# Altium PCB Socket_Burners.pcbdoc
Units mil, origin at the board's own origin, x right, y up, seen from the top; angles counter-clockwise.
Board outline 5387.64 x 2619.88 mil, 2 copper layers (Top Layer, Bottom Layer); 60 components, 36 nets, 178 pads, 5 vias.
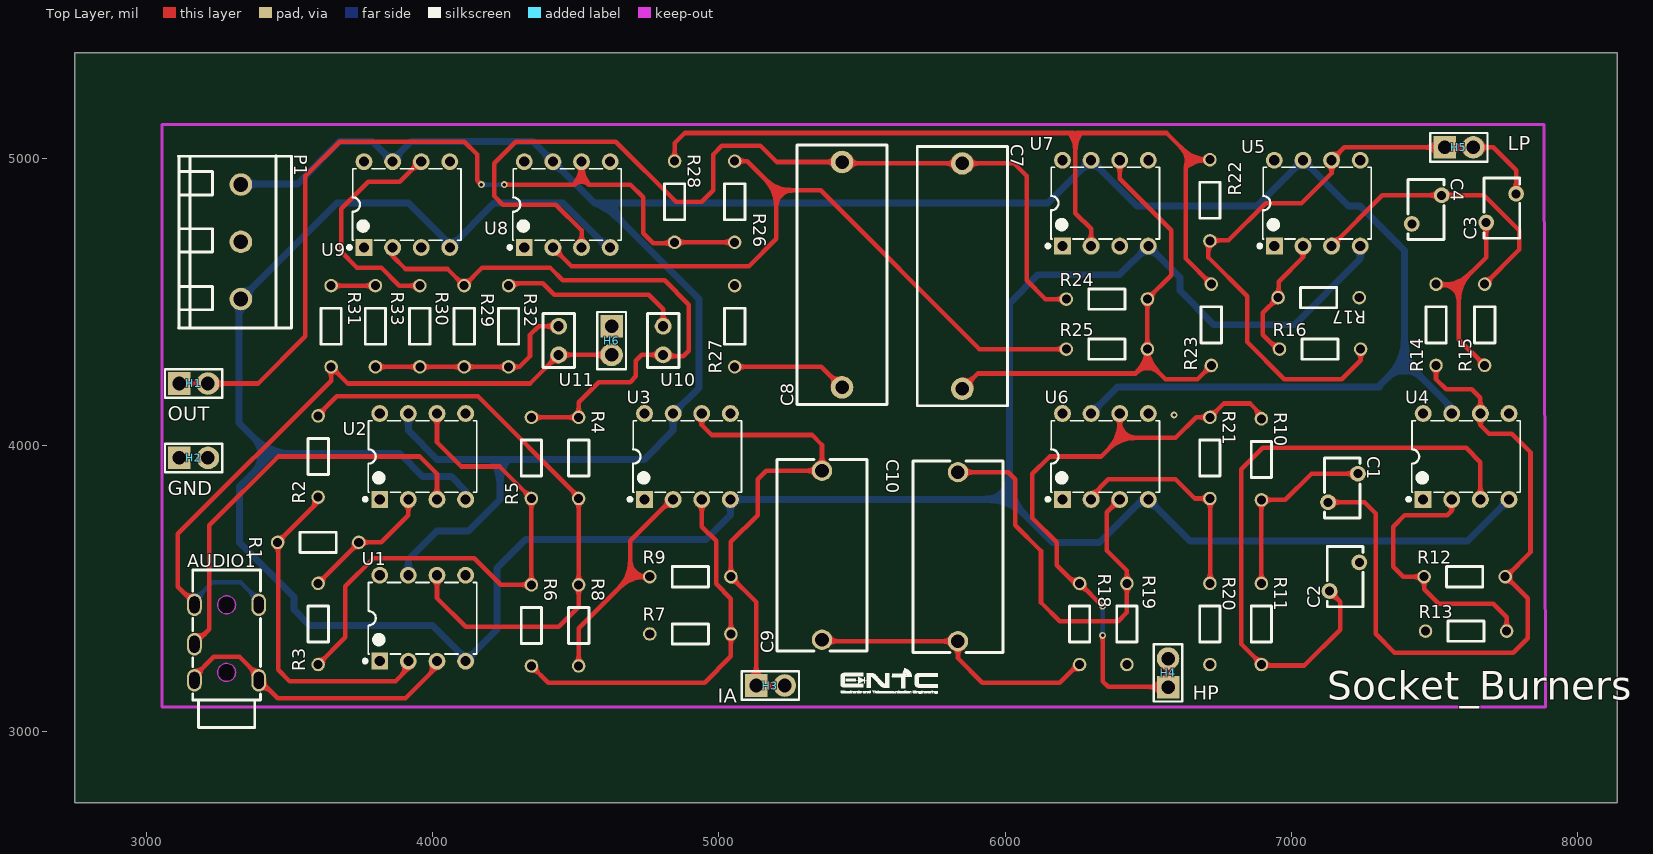
[diagram p0: Top Layer view]
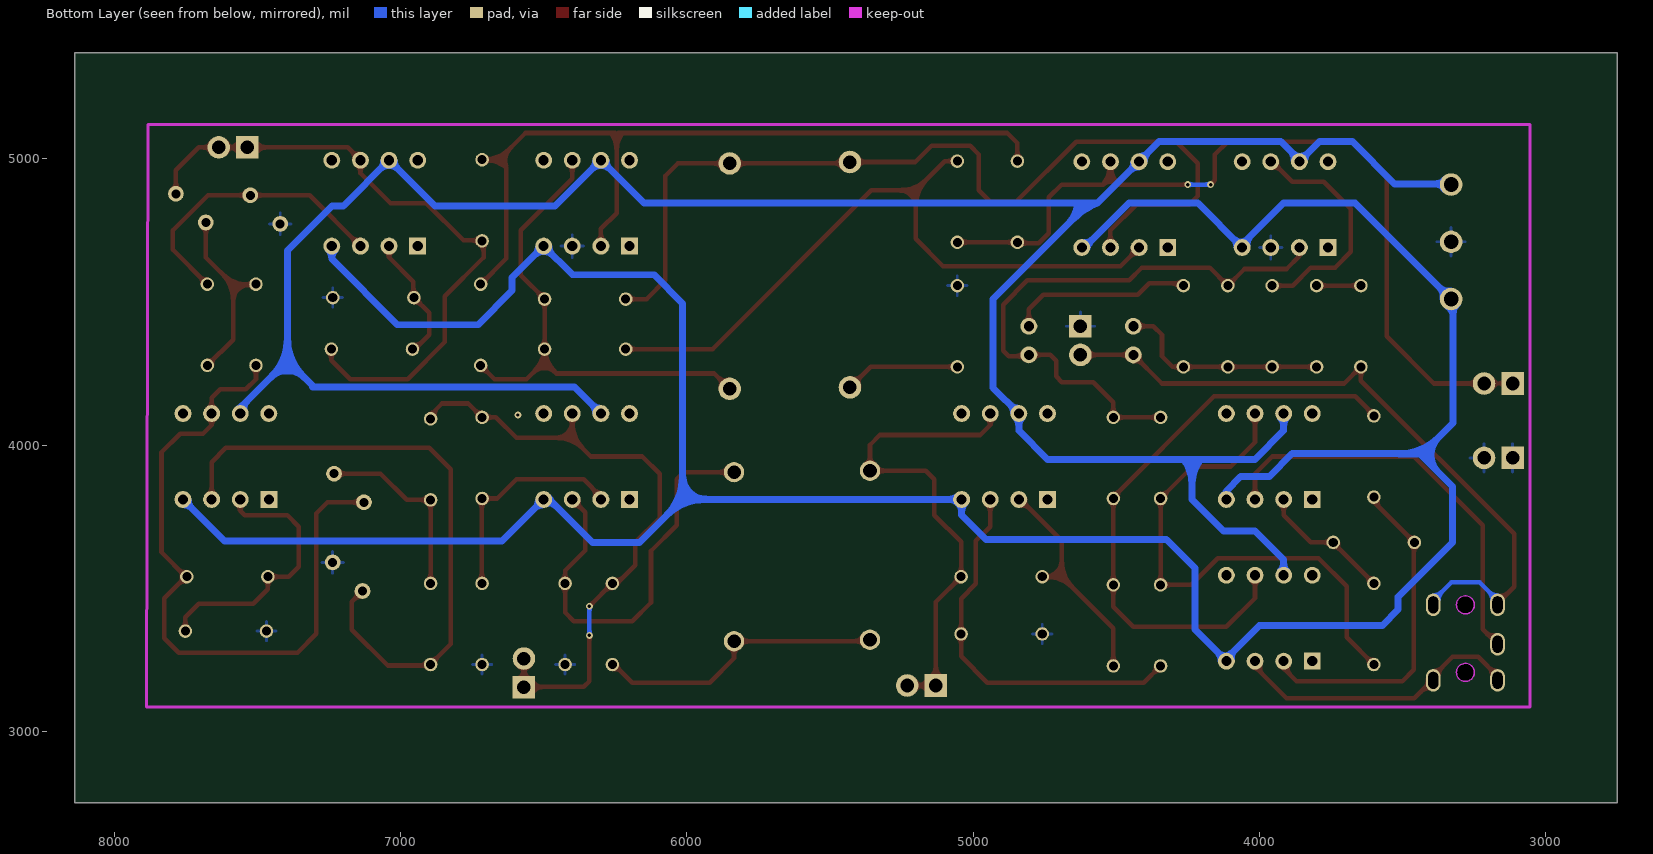
[diagram p1: Bottom Layer view, seen from below]

## Layer stack, top to bottom
Top Layer: signal copper (thickness not stored)
Dielectric: dielectric 12.6, FR-4, Dk 4.8
Bottom Layer: signal copper (thickness not stored)

## Board outline
8137.64,2750 2750,2750 2750,5369.88 8137.64,5369.88

## Design rules (kind name [scope] priority, off if disabled: settings)
BoardOutlineClearance copperThickness1oz [All] p0: genericclearance=10 ignorepadtopadclearanceinfootprint=FALSE except(0: Arc-SplitContinuation Track-SplitContinuation SMDPad-SplitContinuation THPad-SplitContinuation Via-SplitContinuation Fill-SplitContinuation Poly-SplitContinuation Region-SplitContinuation Text-SplitContinuation; 6: Track-CutoutEdge SMDPad-CutoutEdge THPad-CutoutEdge Via-CutoutEdge Region-CutoutEdge; 11.8: Track-OutlineEdge SMDPad-OutlineEdge THPad-OutlineEdge Via-OutlineEdge Fill-OutlineEdge Region-OutlineEdge Poly-OutlineEdge Text-OutlineEdge Fill-CutoutEdge)
BoardOutlineClearance copperThickness2oz [All] p0: genericclearance=10 ignorepadtopadclearanceinfootprint=FALSE except(0: Arc-SplitContinuation Track-SplitContinuation SMDPad-SplitContinuation THPad-SplitContinuation Via-SplitContinuation Fill-SplitContinuation Poly-SplitContinuation Region-SplitContinuation Text-SplitContinuation; 6: Track-CutoutEdge SMDPad-CutoutEdge THPad-CutoutEdge Via-CutoutEdge Region-CutoutEdge; 11.8: Track-OutlineEdge SMDPad-OutlineEdge THPad-OutlineEdge Via-OutlineEdge Fill-OutlineEdge Region-OutlineEdge Poly-OutlineEdge Text-OutlineEdge Fill-CutoutEdge)
Clearance copperThickness1oz [(InNet('$1N2122') OR InNet('GND') OR InNet('LP') OR InNet('$1N3406') OR InNet('$1N3413') OR InNet('$1N3493') OR InNet('-6V') OR InNet('+6V') OR InNet('$1N1412') OR InNet('$1N1406') OR InNet('$1N1439') OR InNet('$1N1445') OR InNet('RL') OR InNet('$1N1575') OR InNet('$1N1792') OR InNet('IA') OR InNet('HP') OR InNet('$1N2127') OR InNet('$1N2610') OR InNet('$1N2938') OR InNet('$1N3220') OR InNet('$1N3417') OR InNet('V_OUT') OR InNet('$1N3727') OR InNet('$1N4390') OR InNet('$1N4395') OR InNet('LA') OR InNet('RA') OR InNet('RLD') OR InNet('$1N5195') OR InNet('$1N5171') OR InNet('$1N5247') OR InNet('$1N6619') OR InNet('$1N6626') OR InNet('$1N7922') OR InNet('$1N7929'))] p1: gap=7 ignorepadtopadclearanceinfootprint=FALSE except(4: Track-Track; 6: Track-SMDPad SMDPad-SMDPad Track-THPad SMDPad-THPad THPad-THPad Track-Via SMDPad-Via THPad-Via Via-Via SMDPad-Fill THPad-Fill Via-Fill Fill-Fill Track-Region SMDPad-Region THPad-Region Via-Region Region-Region Track-Poly SMDPad-Poly THPad-Poly Via-Poly Fill-Poly Region-Poly Poly-Poly Track-Text SMDPad-Text THPad-Text Via-Text Fill-Text Region-Text Poly-Text Text-Text; 6.9: Track-Hole SMDPad-Hole THPad-Hole Via-Hole Fill-Hole Region-Hole Poly-Hole Text-Hole Sheet-Hole; 11.8: Track-Fill Fill-Region Track-Sheet SMDPad-Sheet THPad-Sheet Via-Sheet Fill-Sheet Region-Sheet Poly-Sheet Text-Sheet)
Clearance copperThickness2oz [All] p1: gap=7 ignorepadtopadclearanceinfootprint=FALSE except(6: Track-SMDPad SMDPad-SMDPad Track-THPad SMDPad-THPad THPad-THPad Track-Via SMDPad-Via THPad-Via Via-Via SMDPad-Fill THPad-Fill Via-Fill Fill-Fill Track-Region SMDPad-Region THPad-Region Via-Region Region-Region Track-Poly SMDPad-Poly THPad-Poly Via-Poly Fill-Poly Region-Poly Poly-Poly Track-Text SMDPad-Text THPad-Text Via-Text Fill-Text Region-Text Poly-Text Text-Text; 6.9: Track-Hole SMDPad-Hole THPad-Hole Via-Hole Fill-Hole Region-Hole Poly-Hole Text-Hole Sheet-Hole; 8: Track-Track; 11.8: Track-Fill Fill-Region Track-Sheet SMDPad-Sheet THPad-Sheet Via-Sheet Fill-Sheet Region-Sheet Poly-Sheet Text-Sheet)
DiffPairsRouting differentialPair [All] p1: maxuncoupledlength=10 minlimit=6 maxlimit=6 mostfreqgap=6 toplayer_minwidth=5 toplayer_prefwidth=10 toplayer_maxwidth=100 bottomlayer_minwidth=5 bottomlayer_prefwidth=10 bottomlayer_maxwidth=100
PasteMaskExpansion pasteMaskExpansion [All] p1: expansion=0
PlaneConnect innerPlane [All] p1: planeconnectstyle=Relief reliefexpansion=20 reliefentries=4 reliefconductorwidth=10 reliefairgap=10
PolygonConnect copperRegion [All] p1: connectstyle=Relief reliefentries=4 reliefconductorwidth=10 polygonreliefangle="90 Angle" airgapwidth=10
RoutingVias viaSize [All] p1: viastyle="Through Hole" holewidth=12.0078 minholewidth=11.811 maxholewidth=248.0314 width=24.0158 minwidth=19.685 maxwidth=393.7008
SolderMaskExpansion solderMaskExpansion [All] p1: useseparateexpansions=TRUE expansion=2 expansionbottom=2
Width copperThickness1oz [All] p1: maxlimit=100 minlimit=5 preferedwidth=10
Width copperThickness2oz [All] p1: maxlimit=100 minlimit=8 preferedwidth=10

## Components (designator, comment, footprint, x,y, rotation, side; value= is the part's Value field where it differs from the comment)
AUDIO1 "PJ-3135-B" AUDIO-TH_PJ-3135-B 3280,3309.88 r0 top
C1 "CC1H104ZA1ED3F5O1100" CAP-TH_L5.3-W3.2-P2.54-D0.6-S2.65 7180,3849.88 r270 top
C2 "CC1H104ZA1ED3F5O1100" CAP-TH_L5.3-W3.2-P2.54-D0.6-S2.65 7185,3539.88 r90 top
C3 "CC1H104ZA1ED3F5O1100" CAP-TH_L5.3-W3.2-P2.54-D0.6-S2.65 7732.5,4827.38 r90 top
C4 "CC1H104ZA1ED3F5O1100" CAP-TH_L5.3-W3.2-P2.54-D0.6-S2.65 7472.5,4822.38 r270 top
C7 "MPP684K2E2408158LC" CAP-TH_L23.0-W8.0-P20.00-D1.2 5850,4589.88 r270 top
C8 "MPP684K2E2408158LC" CAP-TH_L23.0-W8.0-P20.00-D1.2 5430,4594.88 r90 top
C9 "KP105J2G1501" CAP-TH_L17.0-W8.0-P15.00-D1.2 5360,3614.88 r90 top
C10 "KP105J2G1501" CAP-TH_L17.0-W8.0-P15.00-D1.2 5835,3609.88 r270 top
H1 "PZ254V-11-02P" HDR-TH_2P-P2.54-V-M 3165,4214.88 r0 top
H2 "PZ254V-11-02P" HDR-TH_2P-P2.54-V-M 3165,3954.88 r0 top
H3 "PZ254V-11-02P" HDR-TH_2P-P2.54-V-M 5180,3159.88 r0 top
H4 "PZ254V-11-02P" HDR-TH_2P-P2.54-V-M 6568.9,3204.05 r90 top
H5 "PZ254V-11-02P" HDR-TH_2P-P2.54-V-M 7585,5039.88 r0 top
H6 "PZ254V-11-02P" HDR-TH_2P-P2.54-V-M 4625,4364.88 r270 top
P1 "WJ500V-5.08-3P" CONN-TH_3P-P5.00_WJ500V-5.08-3P 3330,4709.88 r270 top
R1 "Res_AXIAL-1/8W" RES-TH_BD1.8-L3.2-P7.20-D0.4 3600,3659.88 r180 top
R2 "Res_AXIAL-1/8W" RES-TH_BD1.8-L3.2-P7.20-D0.4 3600,3959.88 r90 top
R3 "Res_AXIAL-1/8W" RES-TH_BD1.8-L3.2-P7.20-D0.4 3600,3374.88 r90 top
R4 "Res_AXIAL-1/8W" RES-TH_BD1.8-L3.2-P7.20-D0.4 4510,3954.88 r270 top
R5 "Res_AXIAL-1/8W" RES-TH_BD1.8-L3.2-P7.20-D0.4 4345,3954.88 r90 top
R6 "Res_AXIAL-1/8W" RES-TH_BD1.8-L3.2-P7.20-D0.4 4345,3369.88 r270 top
R7 "Res_AXIAL-1/8W" RES-TH_BD1.8-L3.2-P7.20-D0.4 4900,3339.88 r0 top
R8 "Res_AXIAL-1/8W" RES-TH_BD1.8-L3.2-P7.20-D0.4 4510,3369.88 r270 top
R9 "Res_AXIAL-1/8W" RES-TH_BD1.8-L3.2-P7.20-D0.4 4900,3539.88 r0 top
R10 "Res_AXIAL-1/8W" RES-TH_BD1.8-L3.2-P7.20-D0.4 6895,3949.88 r270 top
R11 "Res_AXIAL-1/8W" RES-TH_BD1.8-L3.2-P7.20-D0.4 6895,3374.88 r270 top
R12 "Res_AXIAL-1/8W" RES-TH_BD1.8-L3.2-P7.20-D0.4 7605,3539.88 r0 top
R13 "Res_AXIAL-1/8W" RES-TH_BD1.8-L3.2-P7.20-D0.4 7610,3349.88 r0 top
R14 "Res_AXIAL-1/8W" RES-TH_BD1.8-L3.2-P7.20-D0.4 7505,4419.88 r90 top
R15 "Res_AXIAL-1/8W" RES-TH_BD1.8-L3.2-P7.20-D0.4 7675,4419.88 r90 top
R16 "Res_AXIAL-1/8W" RES-TH_BD1.8-L3.2-P7.20-D0.4 7100,4334.88 r0 top
R17 "Res_AXIAL-1/8W" RES-TH_BD1.8-L3.2-P7.20-D0.4 7095,4514.88 r180 top
R18 "Res_AXIAL-1/8W" RES-TH_BD1.8-L3.2-P7.20-D0.4 6260,3374.88 r270 top
R19 "Res_AXIAL-1/8W" RES-TH_BD1.8-L3.2-P7.20-D0.4 6425,3374.88 r90 top
R20 "Res_AXIAL-1/8W" RES-TH_BD1.8-L3.2-P7.20-D0.4 6715,3374.88 r270 top
R21 "Res_AXIAL-1/8W" RES-TH_BD1.8-L3.2-P7.20-D0.4 6715,3954.88 r270 top
R22 "Res_AXIAL-1/8W" RES-TH_BD1.8-L3.2-P7.20-D0.4 6715,4854.88 r90 top
R23 "Res_AXIAL-1/8W" RES-TH_BD1.8-L3.2-P7.20-D0.4 6720,4419.88 r270 top
R24 "Res_AXIAL-1/8W" RES-TH_BD1.8-L3.2-P7.20-D0.4 6355,4509.88 r0 top
R25 "Res_AXIAL-1/8W" RES-TH_BD1.8-L3.2-P7.20-D0.4 6355,4334.88 r0 top
R26 "Res_AXIAL-1/8W" RES-TH_BD1.8-L3.2-P7.20-D0.4 5055,4849.88 r90 top
R27 "Res_AXIAL-1/8W" RES-TH_BD1.8-L3.2-P7.20-D0.4 5055,4414.88 r90 top
R28 "Res_AXIAL-1/8W" RES-TH_BD1.8-L3.2-P7.20-D0.4 4845,4849.88 r270 top
R29 "Res_AXIAL-1/8W" RES-TH_BD1.8-L3.2-P7.20-D0.4 4110,4414.88 r270 top
R30 "Res_AXIAL-1/8W" RES-TH_BD1.8-L3.2-P7.20-D0.4 3955,4414.88 r270 top
R31 "Res_AXIAL-1/8W" RES-TH_BD1.8-L3.2-P7.20-D0.4 3645,4414.88 r270 top
R32 "Res_AXIAL-1/8W" RES-TH_BD1.8-L3.2-P7.20-D0.4 4265,4414.88 r270 top
R33 "Res_AXIAL-1/8W" RES-TH_BD1.8-L3.2-P7.20-D0.4 3800,4414.88 r90 top
U1 "OP07CP" DIP-8_L9.6-W6.4-P2.54-LS7.6-BL-1 3965,3394.88 r0 top
U2 "OP07CP" DIP-8_L9.6-W6.4-P2.54-LS7.6-BL-1 3965,3959.88 r0 top
U3 "OP07CP" DIP-8_L9.6-W6.4-P2.54-LS7.6-BL-1 4890,3959.88 r0 top
U4 "OP07CP" DIP-8_L9.6-W6.4-P2.54-LS7.6-BL-1 7610,3959.88 r0 top
U5 "OP07CP" DIP-8_L9.6-W6.4-P2.54-LS7.6-BL-1 7090,4844.88 r0 top
U6 "OP07CP" DIP-8_L9.6-W6.4-P2.54-LS7.6-BL-1 6350,3959.88 r0 top
U7 "OP07CP" DIP-8_L9.6-W6.4-P2.54-LS7.6-BL-1 6350,4844.88 r0 top
U8 "OP07CP" DIP-8_L9.6-W6.4-P2.54-LS7.6-BL-1 4470,4839.88 r0 top
U9 "OP07CP" DIP-8_L9.6-W6.4-P2.54-LS7.6-BL-1 3910,4839.88 r0 top
U10 "CC1H102MA1EDB44B1100" CAP-TH_L4.8-W2.8-P2.54-D0.7 4805,4364.88 r90 top
U11 "CC1H102MA1EDB44B1100" CAP-TH_L4.8-W2.8-P2.54-D0.7 4440,4364.88 r270 top

## Footprints (in the part's own frame and the unit in brackets; to place one, negate y for a bottom-side part, rotate by r counter-clockwise, add the part's x,y. Pads: shape width x height; smd on the part's side, far side on the other; paste and mask are expansions set on the pad)
AUDIO-TH_PJ-3135-B [mm]
  oval 1.3x2 hole 0.9 slot 1.5 at 90 deg: 1(-2.85,-3.35) 1(2.85,-3.35) 2(-2.85,-0.15) 3(-2.85,3.35) 3(2.85,3.35)
  Board Outline Layer circle w0.005: c0,3.35 r0.8
  Board Outline Layer circle w0.005: c0,-2.65 r0.8
  Board Outline Layer region: 0.8,3.35 0.721,3.003 0.499,2.725 0.178,2.57 -0.178,2.57 -0.499,2.725 -0.721,3.003 -0.8,3.35 -0.8,3.35 -0.721,3.697 -0.499,3.975 -0.178,4.13 0.178,4.13 0.499,3.975 0.721,3.697 0.8,3.35
  Board Outline Layer region: 0.8,-2.65 0.721,-2.997 0.499,-3.275 0.178,-3.43 -0.178,-3.43 -0.499,-3.275 -0.721,-2.997 -0.8,-2.65 -0.8,-2.65 -0.721,-2.303 -0.499,-2.025 -0.178,-1.87 0.178,-1.87 0.499,-2.025 0.721,-2.303 0.8,-2.65
  Multi-Layer board cut-out: 0.8,3.35 0.721,3.003 0.499,2.725 0.178,2.57 -0.178,2.57 -0.499,2.725 -0.721,3.003 -0.8,3.35 -0.8,3.35 -0.721,3.697 -0.499,3.975 -0.178,4.13 0.178,4.13 0.499,3.975 0.721,3.697 0.8,3.35
  Multi-Layer board cut-out: 0.8,-2.65 0.721,-2.997 0.499,-3.275 0.178,-3.43 -0.178,-3.43 -0.499,-3.275 -0.721,-2.997 -0.8,-2.65 -0.8,-2.65 -0.721,-2.303 -0.499,-2.025 -0.178,-1.87 0.178,-1.87 0.499,-2.025 0.721,-2.303 0.8,-2.65
  silkscreen extent -3,-7.55 3,6.45
CAP-TH_L4.8-W2.8-P2.54-D0.7 [mm]
  round 1.5 hole 0.9: 1(-1.27,0) 2(1.27,0)
  silkscreen extent -2.4,-1.4 2.4,1.4
CAP-TH_L5.3-W3.2-P2.54-D0.6-S2.65 [mm]
  round 1.4 hole 0.8: 1(-1.27,1.325) 2(1.27,-1.325)
  silkscreen extent -2.67,-1.65 2.67,1.52
CAP-TH_L17.0-W8.0-P15.00-D1.2 [mm]
  round 1.8 hole 1.2: 1(-7.501,0) 2(7.501,0)
  silkscreen extent -8.5,-4 8.5,4
CAP-TH_L23.0-W8.0-P20.00-D1.2 [mm]
  round 2 hole 1.2: 1(-10,0) 2(10,0)
  silkscreen extent -11.5,-4 11.5,4
CONN-TH_3P-P5.00_WJ500V-5.08-3P [mm]
  round 2 hole 1.3: 1(-5.08,0) 2(0,0) 3(5.08,0)
  silkscreen extent -7.64,-5.53 7.66,4.5
DIP-8_L9.6-W6.4-P2.54-LS7.6-BL-1 [mm]
  rect 1.5x1.5 hole 0.9: 1(-3.81,-3.81)
  round 1.5 hole 0.9: 2(-1.27,-3.81) 3(1.27,-3.81) 4(3.81,-3.81) 5(3.81,3.81) 6(1.27,3.81) 7(-1.27,3.81) 8(-3.81,3.81)
  silkscreen extent -5.25,-3.95 4.8,3.17
HDR-TH_2P-P2.54-V-M [mm]
  rect 2x2 hole 1.2: 1(-1.27,0)
  round 2 hole 1.2: 2(1.27,0)
  silkscreen extent -2.54,-1.27 2.54,1.27
RES-TH_BD1.8-L3.2-P7.20-D0.4 [mm]
  round 1.2 hole 0.8: 1(-3.6,0) 2(3.6,0)
  silkscreen extent -1.6,-0.9 1.6,0.9

## Via types
v1: diameter 24.02, hole 12.01, Top Layer to Bottom Layer, 5 vias

## Nets (pads, with @x,y where several pads share a name; then routed paths per layer and width w, separated by ;. In a path a pad name is that pad's centre, name@x,y a point inside that pad or via, vN(x,y) a via of type N, cw(c..) or ccw(c..) an arc to the next point about the centre after c; other vN are vias at no path point)
$1N1406: R1.2 R2.1 U1.2 | length 1177.9
  Top Layer w16: R2.1@3600,3818.15 3600,3801.61 R1.2 3460,3658.15 3460,3214.88 3500,3174.88 3870,3174.88 3915,3219.88 U1.2
$1N1412: R1.1 R3.2 U2.2 | length 469.6
  Top Layer w16: R3.2 3741.73,3658.34 R1.1 3820,3659.88 3915,3754.88 U2.2
$1N1439: R2.2 R4.2 R8.1 U1.6 | length 2114.6
  Top Layer w16: R2.2 3602.5,4104.11 3602.5,4107.38 3665,4169.88 4158.27,4169.88 4510,3818.15 4510,3813.15 R8.1 4510,3434.88 4440,3364.88 4115,3364.88 4015,3464.88 U1.6
$1N1445: R3.1 R5.1 R6.1 U2.6 | length 1855.2
  Top Layer w16: R3.1@3600,3233.15 3695,3328.15 3695,3506.57 3793.31,3604.88 4145,3604.88 4238.27,3511.61 R6.1 4345,3813.15 4233.27,3924.88 4100,3924.88 4015,4009.88 U2.6
$1N1575: R6.2 R7.2 U3.3 | length 1349.3
  Top Layer w16: R6.2@4345,3228.15 4403.27,3169.88 4950,3169.88 5041.73,3261.61 R7.2 5041.73,3463.15 4990,3514.88 4990,3664.88 4940,3714.88 U3.3
$1N1792: R8.2 R9.1 U3.2 | length 789.6
  Top Layer w16: R8.2@4510,3228.15 4510,3359.88 4690,3539.88 ; R9.1 4690,3539.88 ; U3.2 4835,3809.88 4690,3664.88 4690,3539.88
$1N2122: C1.2 R12.2 R14.1 U4.6 | length 2437.2
  Top Layer w16: C1.2 7255,3799.88 7294.02,3760.86 7294.02,3340.86 7360,3274.88 7775,3274.88 7825,3324.88 7825,3464.88 7750,3539.88 7835,3624.88 7835,3974.88 7770,4039.88 7690,4039.88 7660,4069.88 U4.6 7660,4164.88 7630,4194.88 7540,4194.88 7505,4229.88 R14.1@7505,4278.15
$1N2127: R12.1 R13.2 U4.2 | length 950.7
  Top Layer w16: U4.2 7560,3770.88 7544,3754.88 7395,3754.88 7355,3714.88 7355,3574.88 7390,3539.88 R12.1 7463.27,3496.61 7515,3444.88 7705,3444.88 7751.73,3398.15 R13.2
$1N2610: R16.1 R17.2 U5.2 | length 447
  Top Layer w16: R16.1 6950,4334.88 6900,4384.88 6900,4461.61 R17.2 6955,4516.61 6955,4569.88 7040,4654.88 U5.2
$1N2938: R20.1 R21.2 U6.2 | length 775.1
  Top Layer w16: U6.2 6300,3819.88 6360,3879.88 6595,3879.88 6661.73,3813.15 6715,3813.15 6716.24,3811.91 6716.24,3517.86 R20.1
$1N3220: R22.2 R23.1 R28.1 U7.2 | length 2886.7
  Top Layer w16: R28.1 4845,5054.88 4880,5089.88 6240,5089.88 6245,5084.88 ; U7.2 6300,4754.88 6245,4809.88 6245,5084.88 ; R22.2 6656.73,4996.61 ; R23.1 6630,4651.61 6630,4969.88 6656.73,4996.61 ; 6245,5084.88 6250,5089.88 6563.46,5089.88 6656.73,4996.61
$1N3406: C7.1 C8.2 R24.1 U8.3 | length 3235.4
  Top Layer w16: U8.3 4520,4749.88 4430,4839.88 4245,4839.88 4215,4869.88 4215,4984.88 4290,5059.88 4640,5059.88 4850,4849.88 4940,4849.88 4980,4889.88 4980,5014.88 5010,5044.88 5145,5044.88 5201.3,4988.58 C8.2 5435,4983.58 C7.1 6031.3,4983.58 6075,4939.88 6075,4574.88 6140,4509.88 R24.1
$1N3413: C7.2 R23.2 R24.2 R25.2 U7.6 | length 1766.5
  Top Layer w16: C7.2 5903.7,4249.88 6455,4249.88 6496.73,4291.61 ; U7.6 6400,4929.88 6580,4749.88 6580,4593.15 R24.2 R25.2 6496.73,4293.15 6560,4229.88 6671.73,4229.88 R23.2@6720,4278.15
$1N3417: R25.1 R26.2 U8.2 | length 2446.6
  Top Layer w16: U8.2 4485,4624.88 5105,4624.88 5200,4719.88 5200,4889.88 ; R26.2 5098.27,4991.61 5200,4889.88 ; R25.1 5910,4334.88 5355,4889.88 5200,4889.88
$1N3493: C8.1 R27.1 | length 404.8
  Top Layer w16: R27.1@5055,4273.15 5358.03,4273.15 C8.1
$1N3727: R30.1 U9.6 | length 822.3
  Top Layer w16: R30.1 3883.27,4556.61 3820,4619.88 3735,4619.88 3680,4674.88 3680,4824.88 3775,4919.88 3885,4919.88 3955,4989.88 U9.6
$1N4390: C9.1 C10.2 R18.2 | length 1032.7
  Top Layer w16: C9.1 5365,3314.58 C10.2 5835,3254.88 5920,3169.88 6190,3169.88 6260,3239.88 R18.2@6260,3233.15
$1N4395: C10.1 R19.2 U6.3 | length 1459.7
  Top Layer w16: C10.1 5835.3,3904.88 6010,3904.88 6035,3879.88 6035,3719.88 6125,3629.88 6125,3449.88 6190,3384.88 6395,3384.88 6425,3414.88 R19.2 6425,3561.61 6355,3631.61 6355,3764.88 U6.3
$1N5171: R32.1 U10.2 | length 640.7
  Top Layer w16: R32.1 4273.27,4564.88 4385,4564.88 4425,4524.88 4755,4524.88 4805,4474.88 U10.2
$1N5195: R29.2 R30.2 R32.2 R33.1 U11.1 | length 742.6
  Top Layer w16: R33.1@3800,4273.15 3955,4273.15 4110,4273.15 4265,4273.15 4303.27,4273.15 4340,4309.88 4340,4384.88 4369.99,4414.88 U11.1
$1N5247: R31.1 R33.2 | length 155
  Top Layer w16: R31.1 R33.2
$1N6619: C1.1 R10.2 R11.1 | length 666.7
  Top Layer w16: R11.1 6895,3808.15 6978.27,3808.15 7070,3899.88 C1.1
$1N6626: C2.1 R11.2 U4.3 | length 2206
  Top Layer w16: C2.1 7170,3452.71 7170,3354.88 7045,3229.88 6898.27,3229.88 6895,3233.15 6895,3234.88 6825,3304.88 6825,3914.88 6900,3989.88 7610,3989.88 7660,3939.88 U4.3
$1N7922: C3.1 R14.2 R15.1 | length 656.7
  Top Layer w16: R14.2 7506.73,4559.88 7585,4559.88 ; R15.1@7675,4278.15 7585,4368.15 7585,4559.88 ; C3.1 7680,4777.05 7680,4654.88 7585,4559.88
$1N7929: C4.1 R15.2 U5.3 | length 1017.2
  Top Layer w16: U5.3 7317.5,4872.38 C4.1 7672.5,4872.38 7795,4749.88 7795,4681.61 R15.2
+6V: P1.1 U1.7 U2.7 U3.7 U4.7 U5.7 U6.7 U7.7 U8.7 U9.7 | length 9055.8
  Bottom Layer w24: P1.1 3332.5,4912.38 3527.5,4912.38 3675,5059.88 3790,5059.88 U9.7 3860,4994.88 3925,5059.88 4350,5059.88 U8.7 4565,4844.88 4595,4844.88 ; U1.7 3915,3599.88 4015,3699.88 4125,3699.88 4235,3809.88 4235,3946.93 4237.95,3949.88 ; U2.7 3915,4049.88 4015,3949.88 4237.95,3949.88 ; U6.7 6392.11,4201.99 7307.11,4201.99 ; 7304.61,4204.49 7395,4294.88 ; U4.7 7560,4129.88 7395,4294.88 ; 4237.95,3949.88 4740,3949.88 4840,4049.88 U3.7 4930,4199.88 4930,4509.88 4595,4844.88 ; 4595,4844.88 6150,4844.88 U7.7 6460,4834.88 6880,4834.88 U5.7 7200,4834.88 7240,4834.88 7395,4679.88 7395,4294.88
-6V: P1.3 U1.4 U2.4 U3.4 U4.4 U5.4 U6.4 U7.4 U8.4 U9.4 | length 10885.9
  Bottom Layer w24: U2.4 4115,3839.88 4065,3889.88 3965,3889.88 3885,3969.88 3430,3969.88 ; U8.4 4610,4689.88 4455,4844.88 4215,4844.88 U9.4 4060,4699.88 3915,4844.88 3665,4844.88 P1.3 3322.93,4502.81 3322.93,4076.95 3430,3969.88 ; U5.4 7240,4649.88 7010,4419.88 6730,4419.88 6610,4539.88 6610,4584.88 U7.4 6400,4594.88 6115,4594.88 6015,4494.88 6015,3809.88 ; U4.4 7615,3664.88 6645,3664.88 U6.4 6480,3809.88 6330,3659.88 6165,3659.88 6015,3809.88 ; 3430,3969.88 3430,3959.88 3325,3854.88 3325,3659.88 3515,3469.88 3515,3424.88 3570,3369.88 4000,3369.88 4115,3254.88 U1.4 4225,3354.88 4225,3569.88 4325,3669.88 4955,3669.88 5040,3754.88 U3.4 6015,3809.88
GND: C2.2 C4.2 H2.1 H2.2 H6.1 P1.2 R7.1 R13.1 R17.1 R19.1 R20.2 R27.2 U7.3 U9.3
  other v1: 6590,4104.88
HP: H4.1 H4.2 R10.1 R18.1 R21.1 U6.6 | length 2190.1
  Top Layer w16: v1(6340,3334.88) 6340,3174.88 6360,3154.88 6568.07,3154.88 H4.1 H4.2 ; v1(6340,3436.61) R18.1 6243.27,3516.61 6180,3579.88 6180,3659.88 6095,3744.88 6095,3899.88 6155,3959.88 6335,3959.88 6400,4024.88 ; U6.6 6400,4024.88 ; R10.1 6895,4104.88 6855,4144.88 6763.27,4144.88 R21.1 6666.73,4096.61 6595,4024.88 6400,4024.88
  Bottom Layer w16: v1(6340,3334.88) v1(6340,3436.61)
IA: C9.2 H3.1 H3.2 R9.2 U3.6 | length 1711.6
  Top Layer w16: U3.6 4940,4069.88 4975,4034.88 5325.3,4034.88 5360,4000.18 C9.2 5165.3,3910.18 5135,3879.88 5135,3754.88 5041.73,3661.61 R9.2 5130,3451.61 H3.1 H3.2
LA: AUDIO1.1 U1.3 | length 1027
  Top Layer w16: AUDIO1.1@3167.8,3177.99 3167.8,3192.68 3235,3259.88 3325,3259.88 3392.2,3192.68 AUDIO1.1@3392.2,3177.99 ; AUDIO1.1@3394.09,3179.88 3459.09,3114.88 3905,3114.88 4020,3229.88 4020,3239.88 U1.3
LP: C3.2 H5.1 H5.2 R16.2 R22.1 U5.6 | length 2272.5
  Top Layer w16: R22.1@6715,4713.15 6710,4708.15 6710,4654.88 6845,4519.88 6845,4359.88 6975,4229.88 7175,4229.88 7241.73,4296.61 R16.2 ; R22.1@6716.73,4714.88 6780,4714.88 6910,4844.88 7035,4844.88 7140,4949.88 U5.6 7185,5039.88 H5.1 7705,5039.88 7784.66,4960.22 C3.2
RA: AUDIO1.2 U2.3 | length 1446.8
  Top Layer w16: AUDIO1.2 3220,3356.18 3220,3719.88 3460,3959.88 3955,3959.88 4015,3899.88 U2.3
RL: AUDIO1.3 H6.2 R31.2 U11.2 | length 2430.2
  Top Layer w16: AUDIO1.3@3167.8,3441.77 3167.8,3447.09 3110,3504.88 3110,3689.88 3645,4224.88 3645,4273.15 3703.27,4214.88 4340.01,4214.88 U11.2 H6.2
  Bottom Layer w16: AUDIO1.3@3167.8,3441.77 3167.8,3457.68 3230,3519.88 3330,3519.88 3392.2,3457.68 AUDIO1.3@3392.2,3441.77
RLD: R4.1 R5.2 R29.1 U9.2 U10.1 | length 2062
  Top Layer w16: U9.2 3860,4659.88 3905,4614.88 4051.73,4614.88 R29.1 4173.27,4619.88 4410,4619.88 4455,4574.88 4810,4574.88 4895,4489.88 4895,4329.88 4875,4309.88 4810.01,4309.88 U10.1 4730.01,4314.89 4710,4294.88 4710,4239.88 4690,4219.88 4580,4219.88 4510,4149.88 R4.1 R5.2
V_OUT: H1.1 H1.2 R26.1 R28.2 U8.6 | length 2968.1
  Top Layer w10: H1.1 H1.2
  Top Layer w16: H1.2 3390,4214.88 3555,4379.88 3555,4939.88 3675,5059.88 4110,5059.88 4155,5014.88 4155,4924.88 v1(4170,4909.88) ; v1(4250,4909.88) 4495,4909.88 4520,4934.88 ; U8.6 4520,4934.88 ; R26.1@5055,4708.15 4845,4708.15 4841.73,4704.88 4770,4704.88 4735,4739.88 4735,4864.88 4690,4909.88 4545,4909.88 4520,4934.88
  Bottom Layer w16: v1(4170,4909.88) v1(4250,4909.88)
pads on no net: U1.1 U1.5 U1.8 U2.1 U2.5 U2.8 U3.1 U3.5 U3.8 U4.1 U4.5 U4.8 U5.1 U5.5 U5.8 U6.1 U6.5 U6.8 U7.1 U7.5 U7.8 U8.1 U8.5 U8.8 U9.1 U9.5 U9.8

## Polygon pours and split planes (outlines as drawn)
GND on Bottom Layer (solid, remove dead copper, pour order 0): 3000,5109.88 7875,5109.88 7875,3024.88 3000,3024.88

## Keep-outs
Board Outline Layer:
  lines w10: 3055,3084.88 7887.64,3084.88 7882.14,5119.88 3055,5119.88 3055,3084.88

## Other copper
Top Layer:
  drawing of 170 lines, arcs and shapes, not listed
Bottom Layer:
  region net RL: 3357.85,3480.72 3371.52,3489.68 3374.2,3487.36 3377,3485.58 3379.94,3484.23 3383,3483.23 3386.19,3482.48 3389.51,3481.89 3396.55,3480.77 3366.61,3455.55 3366.48,3458.75 3366.06,3462.13 3365.37,3465.59 3364.4,3469.04 3363.17,3472.37 3361.66,3475.5 3359.89,3478.31
  region net RL: 3188.48,3489.68 3202.15,3480.72 3200.11,3478.31 3198.34,3475.5 3196.83,3472.37 3195.6,3469.04 3194.63,3465.59 3193.94,3462.13 3193.52,3458.75 3193.39,3455.55 3163.45,3480.77 3170.49,3481.89 3173.81,3482.48 3177,3483.23 3180.06,3484.23 3183,3485.58 3185.8,3487.36
  region net -6V: 3359.42,4556.27 3376.39,4539.3 3374.77,4537.54 3373.43,4535.78 3372.32,4534.01 3371.44,4532.22 3370.76,4530.41 3370.24,4528.58 3369.64,4524.8 3369.43,4520.84 3369.43,4516.66 3369.45,4512.2 3369.29,4507.42 3327.53,4549.17 3332.32,4549.33 3336.78,4549.31 3340.96,4549.31 3344.92,4549.52 3348.7,4550.12 3350.53,4550.64 3352.34,4551.32 3354.13,4552.2 3355.9,4553.31 3357.66,4554.65
  region net -6V: 3334.93,4451.4 3310.93,4462.01 3310.84,4464.52 3310.6,4466.77 3310.2,4468.78 3309.67,4470.59 3309.01,4472.24 3308.22,4473.76 3306.35,4476.55 3304.13,4479.25 3301.66,4482.13 3299.01,4485.47 3296.28,4489.57 3354.37,4478.96 3347.23,4473.16 3343.95,4470.14 3341,4466.95 3338.52,4463.54 3337.48,4461.73 3336.6,4459.85 3335.89,4457.88 3335.37,4455.82 3335.04,4453.67
  region net +6V: 3381.67,4924.38 3385.42,4900.38 3383.08,4900.28 3380.9,4899.97 3378.86,4899.48 3376.94,4898.81 3375.14,4897.98 3373.43,4897 3370.22,4894.66 3367.19,4891.89 3364.21,4888.79 3357.86,4882.07 3354.11,4941 3357.82,4937.9 3361.04,4934.9 3363.97,4932.09 3366.83,4929.58 3369.82,4927.45 3371.43,4926.56 3373.15,4925.81 3375.01,4925.2 3377.03,4924.75 3379.24,4924.48
  region net -6V: 4134.94,3281.79 4151.91,3264.82 4150.05,3262.64 4148.53,3260.21 4147.3,3257.56 4146.34,3254.76 4145.61,3251.86 4145.07,3248.9 4144.47,3243.03 4113.15,3274.35 4119.02,3274.95 4121.98,3275.49 4124.88,3276.22 4127.68,3277.18 4130.32,3278.41 4132.76,3279.93
  region net -6V: 4079.74,3273.17 4104.21,3282.64 4106.31,3280.76 4108.54,3279.17 4110.88,3277.83 4113.32,3276.67 4118.46,3274.76 4123.85,3273.05 4085.95,3250.14 4086.26,3252.97 4086.24,3256.03 4085.9,3259.21 4085.25,3262.41 4084.29,3265.51 4083.05,3268.41 4081.53,3271
  region net +6V: 3903,3585.08 3927,3585.08 3927.23,3582.23 3927.87,3579.42 3928.87,3576.69 3930.17,3574.03 3931.71,3571.46 3933.42,3568.99 3937.15,3564.41 3892.85,3564.41 3896.58,3568.99 3898.29,3571.46 3899.83,3574.03 3901.13,3576.69 3902.13,3579.42 3902.77,3582.23
  region net -6V: 4103,3839.88 4127,3839.88 4127.09,3839.16 4127.33,3838.45 4128.23,3837.03 4129.54,3835.64 4131.12,3834.29 4134.49,3831.72 4135.98,3830.53 4137.15,3829.41 4092.85,3829.41 4094.02,3830.53 4095.51,3831.72 4098.88,3834.29 4100.46,3835.64 4101.77,3837.03 4102.67,3838.45 4102.91,3839.16
  region net +6V: 3927,4069.68 3903,4069.68 3902.77,4072.54 3902.13,4075.34 3901.13,4078.07 3899.83,4080.73 3898.29,4083.3 3896.58,4085.77 3892.85,4090.35 3937.15,4090.35 3933.42,4085.77 3931.71,4083.3 3930.17,4080.73 3928.87,4078.07 3927.87,4075.34 3927.23,4072.54
  region net -6V: 5052,3769.68 5028,3769.68 5027.77,3772.54 5027.13,3775.34 5026.13,3778.07 5024.83,3780.73 5023.29,3783.3 5021.58,3785.77 5017.85,3790.35 5062.15,3790.35 5058.42,3785.77 5056.71,3783.3 5055.17,3780.73 5053.87,3778.07 5052.87,3775.34 5052.23,3772.54
  region net -6V: 5080.2,3821.88 5080.2,3797.88 5077.35,3797.65 5074.54,3797.01 5071.81,3796.01 5069.15,3794.71 5066.58,3793.17 5064.11,3791.46 5059.53,3787.74 5059.53,3832.03 5064.11,3828.3 5066.58,3826.59 5069.15,3825.05 5071.81,3823.75 5074.54,3822.75 5077.35,3822.11
  region net +6V: 4852,4069.68 4828,4069.68 4827.77,4072.54 4827.13,4075.34 4826.13,4078.07 4824.83,4080.73 4823.29,4083.3 4821.58,4085.77 4817.85,4090.35 4862.15,4090.35 4858.42,4085.77 4856.71,4083.3 4855.17,4080.73 4853.87,4078.07 4852.87,4075.34 4852.23,4072.54
  region net +6V: 4859.94,4146.79 4876.91,4129.82 4875.05,4127.64 4873.53,4125.21 4872.3,4122.56 4871.34,4119.76 4870.61,4116.86 4870.07,4113.9 4869.47,4108.03 4838.15,4139.35 4844.02,4139.95 4846.98,4140.49 4849.88,4141.22 4852.68,4142.18 4855.32,4143.41 4857.76,4144.93
  region net -6V: 7740.06,3772.97 7723.09,3789.94 7724.95,3792.12 7726.47,3794.56 7727.7,3797.2 7728.66,3800 7729.39,3802.9 7729.93,3805.86 7730.53,3811.73 7761.85,3780.41 7755.98,3779.81 7753.02,3779.28 7750.12,3778.54 7747.32,3777.58 7744.68,3776.35 7742.24,3774.83
  region net +6V: 7526.82,4146.09 7559.25,4147.6 7562.9,4144.28 7567.18,4140.84 7571.62,4137.61 7575.74,4134.86 7534.19,4124.23 7534.89,4125.68 7535.37,4127.13 7535.65,4128.58 7535.74,4130.03 7535.65,4131.47 7535.41,4132.9 7534.48,4135.71 7533.05,4138.46 7531.23,4141.12 7529.12,4143.67
  region net -6V: 7252,4654.68 7228,4654.68 7227.77,4657.54 7227.13,4660.34 7226.13,4663.07 7224.83,4665.73 7223.29,4668.31 7221.58,4670.77 7217.85,4675.35 7262.15,4675.35 7258.42,4670.77 7256.71,4668.31 7255.17,4665.73 7253.87,4663.07 7252.87,4660.34 7252.23,4657.54
  region net +6V: 7020.06,4957.97 7003.09,4974.94 7004.95,4977.12 7006.47,4979.56 7007.7,4982.2 7008.66,4985 7009.39,4987.9 7009.93,4990.86 7010.53,4996.73 7041.85,4965.41 7035.98,4964.81 7033.02,4964.28 7030.12,4963.54 7027.32,4962.58 7024.68,4961.35 7022.24,4959.83
  region net +6V: 7076.91,4974.94 7059.94,4957.97 7057.76,4959.83 7055.32,4961.35 7052.68,4962.58 7049.88,4963.54 7046.98,4964.28 7044.02,4964.81 7038.15,4965.41 7069.47,4996.73 7070.07,4990.86 7070.61,4987.9 7071.34,4985 7072.3,4982.2 7073.53,4979.56 7075.05,4977.12
  region net -6V: 6463.79,3776.7 6462.28,3809.13 6465.6,3812.78 6469.04,3817.06 6472.27,3821.5 6475.02,3825.62 6485.66,3784.07 6484.2,3784.77 6482.75,3785.25 6481.3,3785.53 6479.85,3785.62 6478.41,3785.54 6476.98,3785.29 6474.17,3784.36 6471.42,3782.93 6468.77,3781.11 6466.22,3779
  region net -6V: 6536.91,3789.94 6519.94,3772.97 6517.76,3774.83 6515.32,3776.35 6512.68,3777.58 6509.88,3778.54 6506.98,3779.28 6504.02,3779.81 6498.15,3780.41 6529.47,3811.73 6530.07,3805.86 6530.61,3802.9 6531.34,3800 6532.3,3797.2 6533.53,3794.56 6535.05,3792.12
  region net +6V: 6319.94,4146.79 6336.91,4129.82 6335.05,4127.64 6333.53,4125.21 6332.3,4122.56 6331.34,4119.76 6330.61,4116.86 6330.07,4113.9 6329.47,4108.03 6298.15,4139.35 6304.02,4139.95 6306.98,4140.49 6309.88,4141.22 6312.68,4142.18 6315.32,4143.41 6317.76,4144.93
  region net -6V: 6480.06,4657.97 6463.09,4674.94 6464.95,4677.12 6466.47,4679.56 6467.7,4682.2 6468.66,4685 6469.39,4687.9 6469.93,4690.86 6470.53,4696.73 6501.85,4665.41 6495.98,4664.81 6493.02,4664.28 6490.12,4663.54 6487.32,4662.58 6484.68,4661.35 6482.24,4659.83
  region net -6V: 6536.91,4674.94 6519.94,4657.97 6517.76,4659.83 6515.32,4661.35 6512.68,4662.58 6509.88,4663.54 6506.98,4664.28 6504.02,4664.81 6498.15,4665.41 6529.47,4696.73 6530.07,4690.86 6530.61,4687.9 6531.34,4685 6532.3,4682.2 6533.53,4679.56 6535.05,4677.12
  region net +6V: 6336.91,4974.94 6319.94,4957.97 6317.76,4959.83 6315.32,4961.35 6312.68,4962.58 6309.88,4963.54 6306.98,4964.28 6304.02,4964.81 6298.15,4965.41 6329.47,4996.73 6330.07,4990.86 6330.61,4987.9 6331.34,4985 6332.3,4982.2 6333.53,4979.56 6335.05,4977.12
  region net +6V: 6280.06,4957.97 6263.09,4974.94 6264.95,4977.12 6266.47,4979.56 6267.7,4982.2 6268.66,4985 6269.39,4987.9 6269.93,4990.86 6270.53,4996.73 6301.85,4965.41 6295.98,4964.81 6293.02,4964.28 6290.12,4963.54 6287.32,4962.58 6284.68,4961.35 6282.24,4959.83
  region net -6V: 4582.24,4700.67 4591.71,4725.14 4593.88,4723.35 4596.47,4721.83 4599.37,4720.59 4602.47,4719.64 4605.67,4718.98 4608.86,4718.64 4611.91,4718.62 4614.74,4718.94 4591.83,4681.03 4590.12,4686.43 4588.21,4691.56 4587.06,4694 4585.71,4696.34 4584.12,4698.57
  region net +6V: 4456.91,4969.94 4439.94,4952.97 4437.76,4954.83 4435.32,4956.35 4432.68,4957.58 4429.88,4958.54 4426.98,4959.28 4424.02,4959.81 4418.15,4960.41 4449.47,4991.73 4450.07,4985.86 4450.61,4982.9 4451.34,4980 4452.3,4977.2 4453.53,4974.56 4455.05,4972.12
  region net +6V: 4383.09,5009.82 4400.06,5026.79 4402.24,5024.93 4404.68,5023.41 4407.32,5022.18 4410.12,5021.22 4413.02,5020.49 4415.98,5019.95 4421.85,5019.35 4390.53,4988.03 4389.93,4993.9 4389.39,4996.86 4388.66,4999.76 4387.7,5002.56 4386.47,5005.21 4384.95,5007.64
  region net -6V: 4079.94,4726.79 4096.91,4709.82 4095.05,4707.64 4093.53,4705.21 4092.3,4702.56 4091.34,4699.76 4090.61,4696.86 4090.07,4693.9 4089.47,4688.03 4058.15,4719.35 4064.02,4719.95 4066.98,4720.49 4069.88,4721.22 4072.68,4722.18 4075.32,4723.41 4077.76,4724.93
  region net -6V: 4024.74,4718.17 4049.21,4727.64 4051.31,4725.76 4053.54,4724.17 4055.88,4722.83 4058.32,4721.67 4063.46,4719.76 4068.85,4718.05 4030.95,4695.14 4031.26,4697.97 4031.24,4701.03 4030.9,4704.21 4030.25,4707.41 4029.29,4710.51 4028.05,4713.41 4026.53,4716
  region net +6V: 3823.09,5009.82 3840.06,5026.79 3842.24,5024.93 3844.68,5023.41 3847.32,5022.18 3850.12,5021.22 3853.02,5020.49 3855.98,5019.95 3861.85,5019.35 3830.53,4988.03 3829.93,4993.9 3829.39,4996.86 3828.66,4999.76 3827.7,5002.56 3826.47,5005.21 3824.95,5007.64
  region net +6V: 3875.47,5027.32 3896.19,5014.1 3894.36,5011.92 3892.84,5009.39 3891.62,5006.61 3890.69,5003.65 3890.02,5000.59 3889.6,4997.5 3889.43,4994.47 3889.48,4991.57 3854.64,5018.92 3860.34,5020.05 3863.13,5020.75 3865.85,5021.59 3868.48,5022.62 3870.97,5023.89 3873.31,5025.44
  region net V_OUT: 4233.65,4901.88 4233.65,4917.88 4236.11,4917.7 4238.2,4917.48 4239.16,4917.51 4240.11,4917.72 4241.06,4918.15 4242.06,4918.89 4242.06,4900.88 4241.06,4901.61 4240.11,4902.05 4239.16,4902.25 4238.2,4902.28 4236.11,4902.06
  region net V_OUT: 4186.35,4917.88 4186.35,4901.88 4183.89,4902.06 4181.8,4902.28 4180.84,4902.25 4179.89,4902.05 4178.94,4901.61 4177.94,4900.88 4177.94,4918.89 4178.94,4918.15 4179.89,4917.72 4180.84,4917.51 4181.8,4917.48 4183.89,4917.7
  region net HP: 6348,3420.26 6332,3420.26 6332.18,3422.73 6332.4,3424.81 6332.37,3425.77 6332.16,3426.72 6331.73,3427.67 6330.99,3428.67 6349.01,3428.67 6348.27,3427.67 6347.84,3426.72 6347.63,3425.77 6347.6,3424.81 6347.82,3422.73
  region net HP: 6332,3351.23 6348,3351.23 6347.82,3348.77 6347.6,3346.69 6347.63,3345.72 6347.84,3344.78 6348.27,3343.82 6349.01,3342.82 6330.99,3342.82 6331.73,3343.82 6332.16,3344.78 6332.37,3345.72 6332.4,3346.69 6332.18,3348.77
  region net +6V: 7383,4371.85 cw(c7209.18,4371.85) 7332.09,4248.94 7344.09,4227 cw(c7395,4176.09) 7445.91,4227 7457.91,4248.94 cw(c7580.82,4371.85) 7407,4371.85
  region net +6V: 4674.88,4781.97 cw(c4743.97,4851.06) 4647.97,4832.88 4595,4844.88 4566.03,4832.88 cw(c4470.03,4611.06) 4640.94,4781.97
  region net +6V: 4247,3865.88 cw(c4367,3865.88) 4271,3937.88 4237.95,3949.88 4199,3937.88 cw(c4103,3865.88) 4223,3865.88
  region net -6V: 3367.12,4015.79 cw(c3316.21,3964.88) 3367.12,3913.97 3441.38,3956.08 3513.83,3957.88 3506.97,3981.88 cw(c3506.97,4155.7) 3384.06,4032.79
  region net -6V: 6003,3893.88 cw(c5931,3893.88) 5931,3821.88 5938.03,3797.88 cw(c5938.03,3624.06) 6060.94,3746.97 6077.91,3763.94 cw(c6200.82,3886.85) 6027,3886.85

## Silkscreen, mask and mechanical layers (free items; w line width, h text height)
Top Silkscreen Layer:
  drawing of 31 lines, arcs and shapes, not listed
  text "LP" at 7755,5029.88 h50
  text "OUT" at 3075,4084.88 h50
  text "GND" at 3075,3824.88 h50
  text "HP" at 6655,3109.88 h50
  text "Socket_Burners" at 7125,3109.88 h100
  text "IA" at 4995,3099.88 h50